# Altium PCB TOF-PCBPcbDoc.PcbDoc
Units mm, origin at the board's own origin, x right, y up, seen from the top; angles counter-clockwise.
Board outline 37 x 13.5 mm, 2 copper layers (Top Layer, Bottom Layer), stack 1.591 mm thick; 2 components, 6 nets, 19 pads, 8 vias.
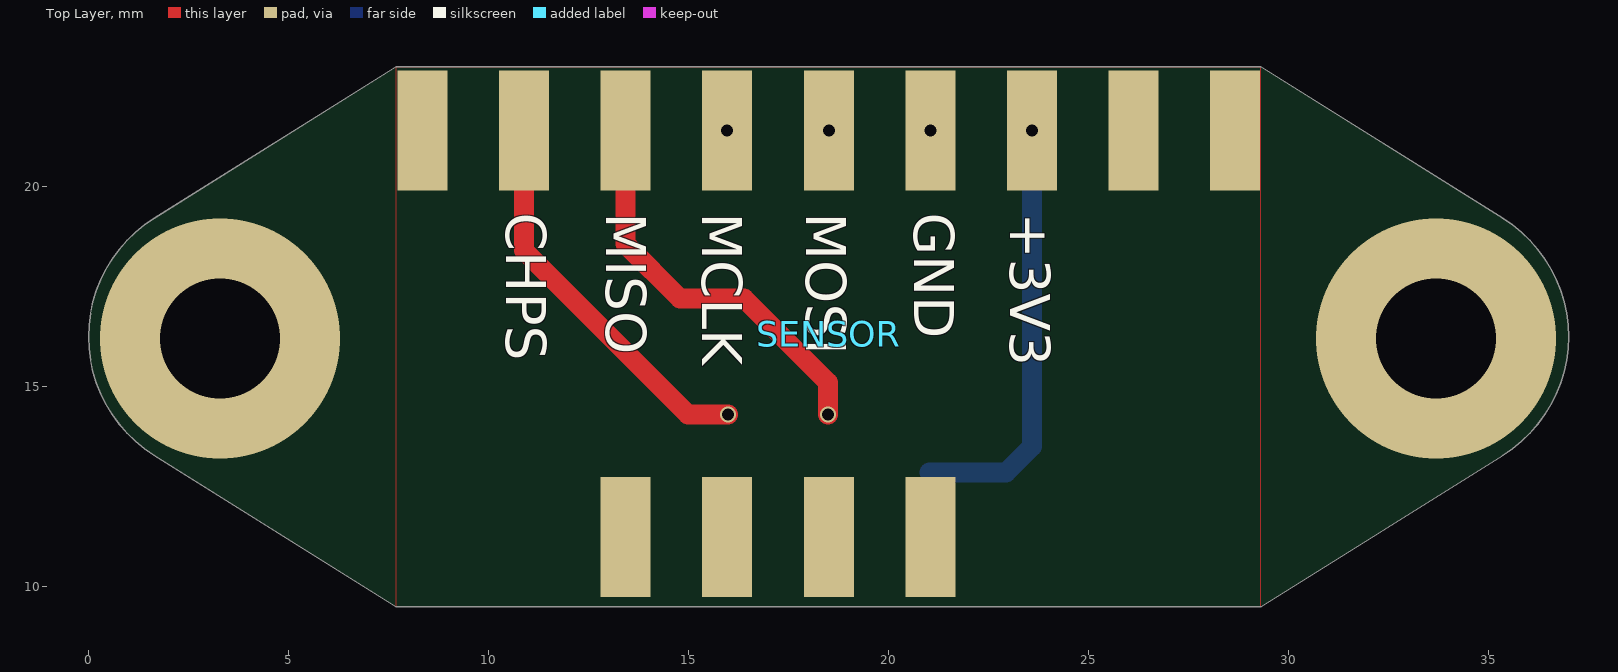
[diagram p0: Top Layer view]
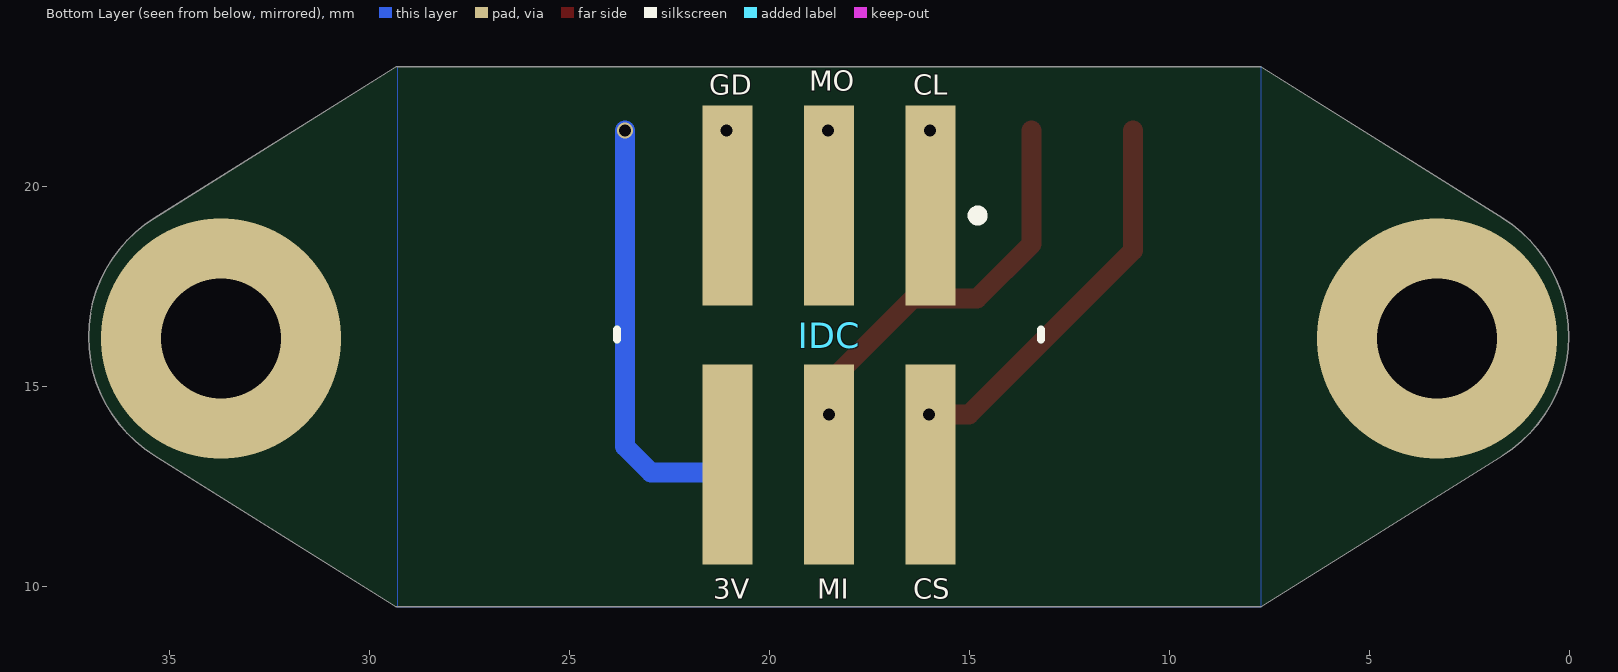
[diagram p1: Bottom Layer view, seen from below]

## Layer stack, top to bottom
Top Solder: solder mask 0.0102, Solder Resist, Dk 3.5
Top Layer: signal copper 0.0356
Dielectric 1: dielectric 1.52, FR-4, Dk 4.8
Bottom Layer: signal copper 0.0356
Bottom Solder: solder mask 0.0102, Solder Resist, Dk 3.5

## Board outline
7.691,9.5 1.656,13.276 cw(c3.513,16.243) 1.656,19.21 7.713,23 29.313,23 35.369,19.21 cw(c33.513,16.243) 35.369,13.276 29.334,9.5

## Design rules (kind name [scope] priority, off if disabled: settings)
BoardOutlineClearance [All] p1: gap=0.254 ignorepadtopadclearanceinfootprint=FALSE except(0: Arc-SplitContinuation Track-SplitContinuation SMDPad-SplitContinuation THPad-SplitContinuation Via-SplitContinuation Fill-SplitContinuation Poly-SplitContinuation Region-SplitContinuation Text-SplitContinuation)
Clearance [All] p1: gap=0.254 ignorepadtopadclearanceinfootprint=FALSE
ComponentClearance [All] p1 off: gap=0.254 collisioncheckmode=3 verticalgap=0.254 showdistances=FALSE
PolygonConnect [All] p1: connectstyle=Direct reliefconductorwidth=0.254 reliefentries=4 polygonreliefangle="90 Angle" airgapwidth=0.254
RoutingVias [All] p1: holewidth=0.711 width=1.27 viastyle="Through Hole" minholewidth=0.711 minwidth=1.27 maxholewidth=0.711 maxwidth=1.27
SolderMaskExpansion [All] p1: expansion=0.102 istentingtop=FALSE
SupplyNets "Schematic Supply Nets_1" [InNet('+3V3')] p1: voltage=0.000
SupplyNets "Schematic Supply Nets" [InNet('GND')] p2: voltage=0.000
Width [All] p1: maxlimit=1 minlimit=0.254 preferedwidth=0.254
29 further rules are at their usual default settings.

## Components (designator, comment, footprint, x,y, rotation, side; value= is the part's Value field where it differs from the comment)
IDC "IDC-6PIN-SMT-2.54_1_1" IDC-6PIN-SMT-2.54 18.5,16.3 r270 bottom
SENSOR "VL53L8CX-PADS" VL53L8CX-PADS 17.28,11.34 r90 top

## Footprints (in the part's own frame and the unit in brackets; to place one, negate y for a bottom-side part, rotate by r counter-clockwise, add the part's x,y. Pads: shape width x height; smd on the part's side, far side on the other; paste and mask are expansions set on the pad)
IDC-6PIN-SMT-2.54 [mm] "SOJ, 6-Leads, Body 10.60x10.50mm, Pitch 2.54mm, IPC Low Density"
  rect 5x1.25 smd: 1(-3.225,2.54) 2(-3.225,0) 3(-3.225,-2.54) 4(3.25,-2.54) 5(3.25,0) 6(3.25,2.54)
  silkscreen extent -3.1,-5.3 0.12,5.3, body extent -5.1,-7.61 5.08,7.61, height 10.5
VL53L8CX-PADS [mm]
  rect 3x1.25 smd: AVDD(10.06,-8.86) CORE(10.06,-11.4) CS(10.06,6.38) GND(-0.1,-3.78) GND(10.06,-3.78) I2C(-0.1,-1.24) INT(10.06,8.92) LP(-0.1,1.3) MISO(10.06,3.84) SCL(10.06,1.3) SDA(10.06,-1.24) SYNC(-0.1,3.84) VIN(10.06,-6.32)

## Via types
v1: diameter 0.4, hole 0.3, Top Layer to Bottom Layer, 6 vias
v2: diameter 6, hole 3, Top Layer to Bottom Layer, 2 vias

## Nets (pads, with @x,y where several pads share a name; then routed paths per layer and width w, separated by ;. In a path a pad name is that pad's centre, name@x,y a point inside that pad or via, vN(x,y) a via of type N, cw(c..) or ccw(c..) an arc to the next point about the centre after c; other vN are vias at no path point)
+3V3: IDC.4 SENSOR.VIN | length 10.7
  Bottom Layer w0.5: IDC.4@21.04,12.85 22.95,12.85 23.6,13.5 v1(23.6,21.4)
CS: IDC.6 SENSOR.CS | length 9.8
  Top Layer w0.5: SENSOR.CS 10.9,18.4 15,14.3 v1(16,14.3)
GND: IDC.3 SENSOR.GND
  other v1: 21.06,21.4
MCLK: IDC.1 SENSOR.SCL
  other v1: 15.98,21.4
MISO: IDC.5 SENSOR.MISO | length 10.1
  Top Layer w0.5: SENSOR.MISO 13.44,18.56 14.8,17.2 16.4,17.2 18.5,15.1 v1(18.5,14.3)
MOSI: IDC.2 SENSOR.SDA
  other v1: 18.52,21.4
pads on no net: SENSOR.AVDD SENSOR.CORE SENSOR.I2C SENSOR.INT SENSOR.LP SENSOR.SYNC
copper on no net:
  other v2: 3.3,16.2 33.7,16.2

## Polygon pours and split planes (outlines as drawn)
GND on Bottom Layer "NONET_L02_P001" (solid, shelved, pour order 1): 7.7,23 29.3,23 29.3,9.5 7.7,9.5
GND on Top Layer "NONET_L01_P000" (solid, shelved, pour order 0): 7.7,23 29.3,23 29.3,9.5 7.7,9.5

## Silkscreen, mask and mechanical layers (free items; w line width, h text height)
Top Overlay:
  text "CHPS" at 10.454,19.346 h1 r270
  text "MISO" at 12.954,19.346 h1 r270
  text "MCLK" at 15.354,19.346 h1 r270
  text "MOSI" at 17.954,19.346 h1 r270
  text "GND" at 20.654,19.346 h1 r270
  text "+3V3" at 23.054,19.346 h1 r270
Bottom Overlay:
  text "MO" at 19,22.4 h0.5
  text "CL" at 16.4,22.3 h0.5
  text "GD" at 21.5,22.3 h0.5
  text "CS" at 16.4,9.7 h0.5
  text "MI" at 18.8,9.7 h0.5
  text "3V" at 21.4,9.7 h0.5
Mechanical 1:
  the board outline again, w0.013